# Altium PCB blm_ctrl_avr.PcbDoc
Units mil, origin at the board's own origin, x right, y up, seen from the top; angles counter-clockwise.
Board outline 2500 x 708.66 mil, 2 copper layers (Top Layer, Bottom Layer); 90 components, 52 nets, 216 pads, 53 vias.
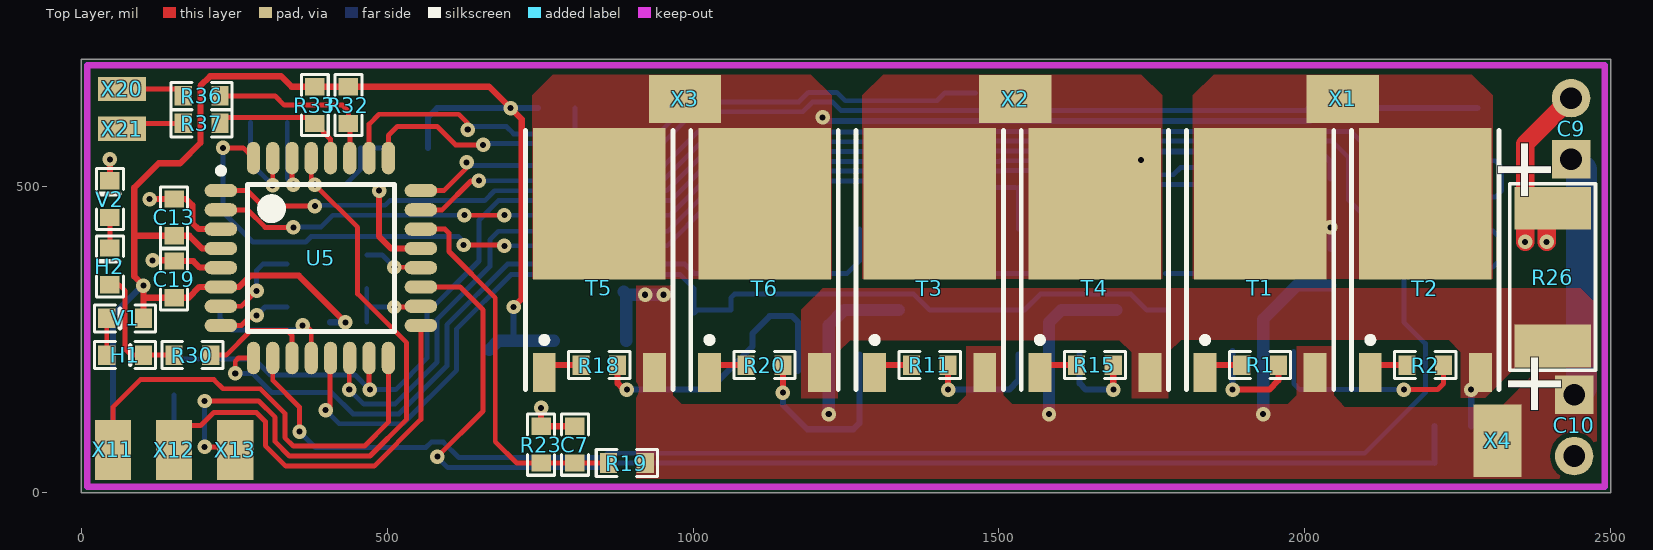
[diagram p0: Top Layer view]
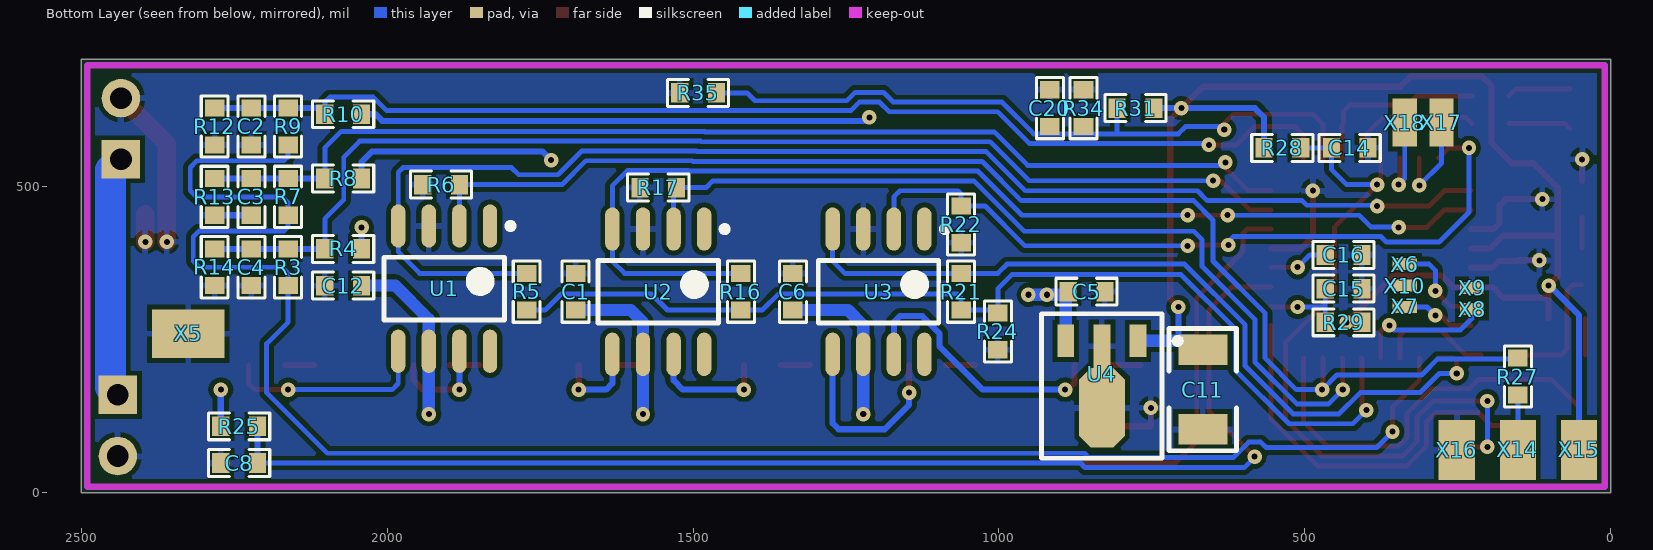
[diagram p1: Bottom Layer view, seen from below]

## Layer stack, top to bottom
Top Layer: signal copper 1.4
Dielectric: dielectric 12.6, FR-4, Dk 4.8
Bottom Layer: signal copper 1.4

## Board outline
0,0 2500,0 2500,708.66 0,708.66

## Design rules (kind name [scope] priority, off if disabled: settings)
Clearance [All] p1: gap=8
PolygonConnect PolygonConnect_1 [(InNet('PHASE_A') OR InNet('PHASE_B') OR InNet('PHASE_C')  OR InNet('NetR25_1') OR InNet('VBAT')) vs (InNet('PHASE_A') OR InNet('PHASE_B') OR InNet('PHASE_C')  OR InNet('NetR25_1') OR InNet('VBAT'))] p1: connectstyle=Direct reliefconductorwidth=10 reliefentries=4 polygonreliefangle="90 Angle"
PolygonConnect [All] p2: connectstyle=Relief reliefconductorwidth=10 reliefentries=4 polygonreliefangle="90 Angle"
RoomDefinition blm_ctrl_processor [InComponentClass('blm_ctrl_processor')] p1: confinementstyle=ConfineIn formatcopy=TRUE lockcomponents=FALSE outline -3968.19,-1186.34 4766.81,-1186.34 4766.81,1858.66 -3968.19,1858.66
RoomDefinition blm_ctrl_power [InComponentClass('blm_ctrl_power')] p2: confinementstyle=ConfineIn formatcopy=TRUE lockcomponents=FALSE outline -4038.19,-1331.34 4986.81,-1331.34 4986.81,1633.66 -4038.19,1633.66
RoutingVias [All] p1: holewidth=9.84 width=23.62 viastyle="Through Hole" minholewidth=9.84 minwidth=23.62 maxholewidth=28 maxwidth=50
SilkToSilkClearance [All] p1 off: silktosilkclearance=10
SilkscreenOverComponentPads [All] p1 off: minsilkscreentomaskgap=3.94
SolderMaskExpansion [All] p1: expansion=4
TestPointUsage [All] p1: valid=0 allowmultiple=FALSE
Testpoint [All] p1: side=15 testpointundercomponent=TRUE minsize=40 maxsize=100 preferedsize=60 minholesize=0 maxholesize=40 preferedholesize=32 testpointgrid=1 style=1023 order=0-112345678
Width [All] p1: maxlimit=200 minlimit=5.91 preferedwidth=8
22 further rules are at their usual default settings.

## Classes and differential pairs
component class blm_ctrl_power: C1 C2 C3 C4 C5 C6 C7 C8 C9 C10 C11 C12 C13 R1 R2 R3 R4 R5 R6 R7 R8 R9 R10 R11 R12 R13 R14 R15 R16 R17 R18 R19 R20 R21 R22 R23 R24 R25 R26 T1 T2 T3 T4 T5 T6 U1 U2 U3 U4 X1 X2 X3 X4 X5
component class blm_ctrl_processor: C14 C15 C16 C17 C18 C19 C20 H1 H2 R27 R28 R29 R30 R31 R32 R33 R34 R35 R36 R37 U5 V1 V2 X6 X7 X8 X9 X10 X11 X12 X13 X14 X15 X16 X17 X18 X19 X20 X21

## Components (designator, comment, footprint, x,y, rotation, side; value= is the part's Value field where it differs from the comment)
C1 "Cap" 0603#1 1691.81,298.66 r180 bottom
C2 "Cap" 0603#2 2221.81,628.66 r180 bottom
C3 "Cap" 0603#2 2221.81,513.66 r180 bottom
C4 "Cap" 0603#2 2221.81,398.66 r180 bottom
C5 "Cap" 0603#1 886.81,328.66 r270 bottom
C6 "Cap" 0603#1 1336.81,298.66 r180 bottom
C7 "Cap" 0603#1 806.81,48.66 r0 top
C8 "Cap" 0603#1 2211.81,48.66 r90 bottom
C9 "Cap Pol2" C00101 2435,645 r270 top
C10 "Cap Pol2" C00101 2440,60 r90 top
C11 "Cap Pol2" 1206 666.81,233.66 r270 bottom
C12 "Cap" 0603#1 2041.81,338.66 r90 bottom
C13 "Cap" 0603#1 151.81,420 r0 top
C14 "Cap" 0603#1 456.81,563.66 r270 bottom
C15 "Cap" 0603#1 466.81,333.66 r270 bottom
C16 "Cap" 0603#1 466.81,388.66 r270 bottom
C19 "Cap" 0603#1 151.81,318.66 r0 top
C20 "Cap" 0603#1 916.81,598.66 r180 bottom
H1 "Led" 0603_LED 41.81,225 r270 top
H2 "Led" 0603_LED 46.81,340 r0 top
R1 "Res1" 0603#1 1896.81,208.66 r270 top
R2 "Res1" 0603#1 2166.81,208.66 r270 top
R3 "Res1" 0603#2 2161.81,338.66 r0 bottom
R4 "Res1" 0603#2 2101.81,398.66 r90 bottom
R5 "Res1" 0603#1 1771.81,358.66 r0 bottom
R6 "Res1" 0603#1 1881.81,503.66 r90 bottom
R7 "Res1" 0603#2 2161.81,453.66 r0 bottom
R8 "Res1" 0603#2 2101.81,513.66 r90 bottom
R9 "Res1" 0603#2 2161.81,568.66 r0 bottom
R10 "Res1" 0603#2 2101.81,618.66 r90 bottom
R11 "Res1" 0603#1 1356.81,208.66 r270 top
R12 "Res1" 0603#2 2281.81,628.66 r180 bottom
R13 "Res1" 0603#2 2281.81,513.66 r180 bottom
R14 "Res1" 0603#2 2281.81,398.66 r180 bottom
R15 "Res1" 0603#1 1626.81,208.66 r270 top
R16 "Res1" 0603#1 1421.81,358.66 r0 bottom
R17 "Res1" 0603#1 1526.81,498.66 r90 bottom
R18 "Res1" 0603#1 816.81,208.66 r270 top
R19 "Res1" 0603#1 921.81,48.66 r90 top
R20 "Res1" 0603#1 1086.81,208.66 r270 top
R21 "Res1" 0603#1 1061.81,358.66 r0 bottom
R22 "Res1" 0603#1 1061.81,468.66 r0 bottom
R23 "Res1" 0603#1 751.81,48.66 r0 top
R24 "Res1" 0603#1 1001.81,293.66 r0 bottom
R25 "Res1" 0603#1 2271.81,108.66 r270 bottom
R26 "Res1" 2512 2405,240 r90 top
R27 "Res1" 0603#1 151.81,160 r180 bottom
R28 "Res1" 0603#1 566.81,563.66 r270 bottom
R29 "Res1" 0603#1 406.81,278.66 r90 bottom
R30 "Res1" 0603#1 211.81,225 r90 top
R31 "Res1" 0603#1 746.81,628.66 r90 bottom
R32 "Res1" 0603#1 436.81,663.66 r180 top
R33 "Res1" 0603#1 381.81,663.66 r180 top
R34 "Res1" 0603#1 861.81,598.66 r180 bottom
R35 "NTC" 0603#1 1461.81,653.66 r90 bottom
R36 "Res1" 0603#1 226.81,648.66 r90 top
R37 "Res1" 0603#1 226.81,603.66 r90 top
T1 "BSH203" TO-252AA 1926.81,334.41 r0 top locked
T2 "BSS123" TO-252AA 2196.81,334.41 r0 top locked
T3 "BSH203" TO-252AA 1386.81,334.41 r0 top locked
T4 "BSS123" TO-252AA 1656.81,334.41 r0 top locked
T5 "BSH203" TO-252AA 846.81,334.41 r0 top locked
T6 "BSS123" TO-252AA 1116.81,334.41 r0 top locked
U1 "TC4428A" SOIC127P600-8BN 1906.81,333.66 r270 bottom
U2 "TC4428A" SOIC127P600-8BN 1556.81,328.66 r270 bottom
U3 "TC4428A" SOIC127P600-8BN 1196.81,328.66 r270 bottom
U4 "µA78L05ACPKR" PK03 831.81,193.66 r0 bottom
U5 "ATmega8-16AC" 32A_L 391.81,383.66 r0 top locked
V1 "Diode" 0603_LED 101.81,285 r90 top
V2 "Diode" 0603_LED 46.81,450 r0 top
X1 "" PAD_SMD_2x3MM#1 2061.81,643.66 r90 top
X2 "" PAD_SMD_2x3MM#1 1526.81,643.66 r90 top
X3 "" PAD_SMD_2x3MM#1 986.81,643.66 r90 top
X4 "" PAD_SMD_2x3MM#1 2315,85 r0 top
X5 "" PAD_SMD_2x3MM#2 2325,260 r270 top
X6 "" PAD_SMD_0.5x1MM 336.81,373.66 r90 bottom
X7 "" PAD_SMD_0.5x1MM 336.81,303.66 r90 bottom
X8 "" PAD_SMD_0.5x1MM 226.81,300 r270 bottom
X9 "" PAD_SMD_0.5x1MM 226.81,335 r270 bottom
X10 "" PAD_SMD_0.5x1MM 336.81,338.66 r90 bottom
X11 "" PAD_SMD_1.5x2.5MM#1 51.81,70 r180 top
X12 "" PAD_SMD_1.5x2.5MM#2 156.81,70 r180 top
X13 "" PAD_SMD_1.5x2.5MM#3 236.81,70 r180 top
X14 "" PAD_SMD_1.5x2.5MM#4 151.81,70 r180 top
X15 "" PAD_SMD_1.5x2.5MM#4 51.81,70 r180 top
X16 "" PAD_SMD_1.5x2.5MM#4 251.81,70 r180 top
X17 "" PAD_SMD_1x2MM 276.81,605 r0 bottom
X18 "" PAD_SMD_1x2MM 336.81,605 r0 bottom
X20 "" PAD_SMD_1x2MM 66.81,660 r90 top
X21 "" PAD_SMD_1x2MM 66.81,595 r90 top

## Footprints (in the part's own frame and the unit in brackets; to place one, negate y for a bottom-side part, rotate by r counter-clockwise, add the part's x,y. Pads: shape width x height; smd on the part's side, far side on the other; paste and mask are expansions set on the pad)
32A_L [mm] "Thin QFP, 32-Leads, Body 7x7mm, Pitch 0.8mm, IPC High Density"
  oval 1.35x0.55 smd: 1(-4.15,2.8) 2(-4.15,2) 3(-4.15,1.2) 4(-4.15,0.4) 5(-4.15,-0.4) 6(-4.15,-1.2) 7(-4.15,-2) 8(-4.15,-2.8) 17(4.15,-2.8) 18(4.15,-2) 19(4.15,-1.2) 20(4.15,-0.4) 21(4.15,0.4) 22(4.15,1.2) 23(4.15,2) 24(4.15,2.8)
  oval 0.55x1.35 smd: 9(-2.8,-4.15) 10(-2,-4.15) 11(-1.2,-4.15) 12(-0.4,-4.15) 13(0.4,-4.15) 14(1.2,-4.15) 15(2,-4.15) 16(2.8,-4.15) 25(2.8,4.15) 26(2,4.15) 27(1.2,4.15) 28(0.4,4.15) 29(-0.4,4.15) 30(-1.2,4.15) 31(-2,4.15) 32(-2.8,4.15)
  silkscreen extent -4.27,-3.05 3.05,3.75, body extent -3.5,-3.5 3.5,3.5, height 1.2
0603#1 [mil]
  rect 32x28 smd: 1(0,0) 2(0,60)
  silkscreen extent -22,-20 22,80
0603#2 [mil]
  rect 32x28 smd: 1(0,0) 2(0,-60)
  silkscreen extent -22,-80 22,20
0603_LED [mil]
  rect 32.01x27.99 smd: 1(0,0) 2(0,60)
  silkscreen extent -22,-20 22,80
1206 [mil]
  rect 50x80 smd: 1(0,0) 2(130,0)
  silkscreen extent -35,-55 165,55
2512 [mil]
  rect 70x125 smd: 1(0,0) 2(225,0)
  silkscreen extent -40,-70 265,70
C00101 [mm]
  rect 1.6x1.6 hole 0.9: 1(2.54,0)
  round 1.6 hole 0.9: 2(0,0)
PAD_SMD_0.5x1MM [mm]
  rect 0.5x1 smd: 1(0,0)
PAD_SMD_1.5x2.5MM#1 [mm]
  rect 1.5x2.5 smd: 1(0,0)
PAD_SMD_1.5x2.5MM#2 [mm]
  rect 1.5x2.5 smd: 1(0.127,0)
PAD_SMD_1.5x2.5MM#3 [mm]
  rect 1.5x2.5 smd: 1(-0.381,0)
PAD_SMD_1.5x2.5MM#4 [mm]
  rect 1.5x2.5 smd far side: 1(0,0)
PAD_SMD_1x2MM [mm]
  rect 1x2 smd: 1(0,0)
PAD_SMD_2x3MM#1 [mm]
  rect 2x3 smd: 1(0,0)
PAD_SMD_2x3MM#2 [mm]
  rect 2x3 smd far side: 1(0,0)
PK03 [mm] "SOT-89; Body 4.6 x 4.25 mm, inc. leads (LxW max)"
  oct 1.9x3.3 smd: 0(0,1.388)
  rect 0.7x1.35 smd: 1(-1.5,-1.388) 3(1.5,-1.388)
  rect 0.7x1.8 smd: 2(0,-1.163)
  silkscreen extent -3.27,-2.51 2.5,3.49
SOIC127P600-8BN [mm] "SOIC, 8-Leads, Body 4.9x3.9mm, Pitch 1.27mm, IPC Medium Density"
  oval 1.8x0.6 smd: 1(-2.6,1.905) 2(-2.6,0.635) 3(-2.6,-0.635) 4(-2.6,-1.905) 5(2.6,-1.905) 6(2.6,-0.635) 7(2.6,0.635) 8(2.6,1.905)
  silkscreen extent -2.72,-2.5 1.3,2.88, body extent -2,-2.5 2,2.5, height 2.59
TO-252AA [mm] "D-PAK/TO-252-AA; 3 Leads (1 Cropped); Body 10.2 (inc. leads) x 6.7 mm (LxW max)"
  rect 0.95x1.6 smd: 1(-2.285,-3.5) 3(2.285,-3.5)
  rect 5.5x6.3 smd: 4(0,3.5)
  silkscreen extent -3.06,-4.2 3.06,6.55

## Part data
C1 C2 C3 C4 C5 C6 C7 C8 C12 C13 C14 C15 C16 C19 C20: "Capacitor"
C9 C10 C11: "Polarized Capacitor (Axial)"
H1 H2: "Led low current"
R1 R2 R3 R4 R5 R6 R7 R8 R9 R10 R11 R12 R13 R14 R15 R16 R17 R18 R19 R20 R21 R22 R23 R24 R25 R26 R27 R28 R29 R30 R31 R32 R33 R34 R36 R37: "Resistor"
R35: "Temperature dependent resistor"
T1 T3 T5: "P-CHANNEL MOSFET WITH DIODE"
T2 T4 T6: "N-CHANNEL MOSFET WITH DIODE"
U4: "Positive-Voltage Regulator"
U5: "8-Bit AVR Microcontroller with 8K Bytes of In-System Programmable Flash Memory"
X1 X2 X3 X4 X5 X6 X7 X8 X9 X10 X11 X12 X13 X14 X15 X16 X17 X18 X20 X21: library part TEST_POINT

## Via types
v1: diameter 23.62, hole 9.84, Top Layer to Bottom Layer, tented both sides, 31 vias
v2: diameter 23.62, hole 9.84, Top Layer to Bottom Layer, 22 vias

## Nets (pads, with @x,y where several pads share a name; then routed paths per layer and width w, separated by ;. In a path a pad name is that pad's centre, name@x,y a point inside that pad or via, vN(x,y) a via of type N, cw(c..) or ccw(c..) an arc to the next point about the centre after c; other vN are vias at no path point)
ADR1: U5.7 X6.1 | length 156.6
  Top Layer w8: U5.7 261.73,304.92 v2(286.81,330)
  Bottom Layer w8: v2(286.81,330) 286.81,363.66 296.81,373.66 X6.1
ADR2: U5.8 X7.1 | length 122.1
  Top Layer w8: U5.8 261.81,273.43 278.39,290 v2(286.81,290)
  Bottom Layer w8: v2(286.81,290) 300.47,303.66 X7.1
  Bottom Layer w10: v2(286.81,290) v2@287.62,289.19
ADR3_PPM: U5.12 X8.1 | length 223.1
  Top Layer w8: v2(361.81,273.66) 366.81,273.66 376.06,264.41 U5.12
  Bottom Layer w8: X8.1 226.81,285 245.62,266.19 354.34,266.19 v2(361.81,273.66)
CTRL_H_A: R6.1 R27.2 U1.2 U5.15 | length 2122.8
  Top Layer w8: v1@470.55,169.92 U5.15
  Bottom Layer w8: R27.2 153,218.81 283,218.81 309.33,192.49 447.99,192.49 v1(471.81,168.66) 513.93,168.66 565.06,219.79 565.06,293.66 650.15,378.76 650.15,445.67 681.95,477.47 963.5,477.47 1027.69,541.66 1500.21,541.66 1501.21,542.66 1675.18,542.66 1714.18,503.66 R6.1 U1.2
CTRL_H_B: R17.1 U2.2 U5.14 | length 1440.3
  Top Layer w8: v1(438.14,168.66) 438.14,219.36 U5.14
  Bottom Layer w8: v1(438.14,168.66) 461.95,144.85 512.75,144.85 581.68,213.79 581.68,283.53 668,369.85 668,413.52 681.95,427.47 958.76,427.47 1040.95,509.66 1467.81,509.66 1478.81,498.66 R17.1 ; U2.2 R17.1@1531.81,498.66
CTRL_H_C: R22.1 U3.2 U5.32 | length 1240.7
  Top Layer w8: v2(231.81,563.66) 264.96,563.66 U5.32 ; v2(625,405) 690.47,405 v1(691.81,403.66)
  Bottom Layer w8: v2(231.81,563.66) 231.81,458.66 280.62,409.85 366.81,409.85 375.62,418.66 400.48,418.66 616.81,418.66 625,410.47 v2(625,405) ; v1(691.81,403.66) 957.58,403.66 1022.58,468.66 R22.1 1061.81,488.66 1066.81,493.66 1161.81,493.66 1171.81,483.66 U3.2
CTRL_L_A: R5.1 U1.4 U5.1 | length 2190.5
  Top Layer w8: U5.1 271.81,493.9 297.05,468.66 v1(381.81,468.66)
  Bottom Layer w8: v1@382.89,477.47 379.05,473.62 379.05,471.43 380.62,469.85 496.67,469.85 504.3,477.47 659.32,477.47 675.51,493.66 957.07,493.66 1021.07,557.66 1493.59,557.66 1494.59,558.66 1681.81,558.66 1720.62,519.85 1785,519.85 1796.81,531.66 1973.81,531.66 1981.81,523.66 U1.4 1981.81,393.66 1946.81,358.66 R5.1
CTRL_L_B: R16.1 U2.4 U5.2 | length 1817.4
  Top Layer w8: U5.2 271.81,462.4 300.55,433.66 v2(346.81,433.66) ; v2(626.34,453.66) v1(691.81,453.66)
  Bottom Layer w8: v2(346.81,433.66) 347.81,434.66 392.29,434.66 411.29,453.66 631.81,453.66 631.81,458.66 v2@630.87,459.6 ; v1(691.81,453.66) 962.32,453.66 1034.32,525.66 1506.84,525.66 1507.84,526.66 1607,526.66 1631.81,501.85 U2.4 1631.81,378.66 1611.81,358.66 R16.1
CTRL_L_C: R21.1 U3.4 U5.9 | length 1307.1
  Top Layer w8: v1(251.81,195) 251.81,215 257.09,220.28 U5.9
  Bottom Layer w8: v1(251.81,195) 280.47,195 311.81,163.66 409.46,163.66 444.27,128.85 519.37,128.85 597.68,207.16 597.68,274.53 696.81,373.66 986.81,373.66 1001.81,358.66 R21.1 1251.81,358.66 1271.81,378.66 U3.4
CTRL_L_COM: R5.2 R16.2 R21.2 R24.1 U5.13 | length 1718.9
  Top Layer w8: v1(399.49,135) 402.87,135 406.81,138.94 406.81,219.53 U5.13
  Bottom Layer w8: v1(399.49,135) 421.64,112.85 526,112.85 613.68,200.53 613.68,267.91 702.44,356.66 978.81,356.66 1001.81,333.66 R24.1 1006.81,298.66 R21.2 1061.81,318.66 1067.81,324.66 1360.81,324.66 1386.81,298.66 R16.2 1541.81,298.66 1567.81,324.66 1715.81,324.66 1741.81,298.66 R5.2
GND: C1.2 C2.2 C3.2 C4.2 C5.2 C6.2 C7.2 C8.2 C9.2 C10.2 C11.2 C12.2 C13.2 C14.2 C15.2 C16.2 C19.2 C20.2 R6.2 R12.2 R13.2 R14.2 R17.2 R22.2 R23.2 R24.2 R26.2 R34.2 R35.2 U1.3 U2.3 U3.3 U4.0 U4.2 U5.3 U5.5 U5.21 V2.2 X5.1 X9.1 X10.1 X16.1 | length 911.1
  Top Layer w10: V2.2 v2(46.81,545) ; v2(111.81,480) C13.2 171.81,480 181.81,470 181.81,440.91 191.81,430.91 U5.3 ; v2(116.81,380) C19.2@150.47,380 ; C19.2 183.15,378.66 193.9,367.91 U5.5 ; v2(486.81,493.66) 486.81,418.66 506.06,399.41 U5.21 ; v1(751.81,138.66) R23.2 C7.2
  Top Layer w30: v2(2360,410) 2360,570 C9.2 ; v2(2395,410) R26.2@2395,455
  Bottom Layer w10: C3.2 R13.2
IMOT_MEAS: C8.1 R25.2 U5.19 | length 2097.9
  Top Layer w8: U5.19 619.05,336.42 656.81,298.66 656.81,133.66 v1(582.21,59.06)
  Bottom Layer w8: v1(582.21,59.06) 582.21,63.56 581.81,63.56 581.81,58.66 599.31,41.16 859.31,41.16 866.81,48.66 C8.1
  Bottom Layer w10: C8.1 R25.2
LEDS: R30.1 U5.11 | length 189.5
  Top Layer w8: R30.1 236.81,225 276.81,265 336.8,265 344.57,257.23 U5.11
MIDDLE: R3.1 R7.1 R9.1 U5.10 | length 3056.8
  Top Layer w8: U5.10@310.75,217.96 U5.10 313.07,183.74 356.81,140 v1(356.81,100)
  Bottom Layer w8: v1(356.81,100) 382.85,73.96 563.43,73.96 572.35,82.87 592.08,82.87 617.48,57.47 852.99,57.47 860.18,64.66 2097.81,64.66 2196.81,163.66 2196.81,243.66 2161.81,278.66 R3.1 2161.81,358.66 2171.81,368.66 2306.81,368.66 2316.81,378.66 2316.81,418.66 2307.81,427.66 2168.81,427.66 2161.81,434.66 R7.1 2161.81,473.66 2171.81,483.66 2311.81,483.66 2321.81,493.66 2321.81,531.66 2310.81,542.66 2168.81,542.66 2161.81,549.66 R9.1
MISO: U5.16 X11.1 | length 728.4
  Top Layer w8: X11.1 51.81,140 96.81,185 216.81,185 231.81,170 292.78,170 333,129.78 333,90.14 346.95,76.19 463,76.19 502.05,115.24 U5.16
MOSI: R27.1 X14.1 | length 90
  Bottom Layer w8: X14.1 R27.1
NetC15_1: C15.1 R29.2 U5.18 | length 143.9
  Top Layer w8: v1(511.81,303.66) 553.94,303.66 U5.18
  Bottom Layer w8: R29.2 466.81,303.66 ; C15.1 466.81,303.66 ; v1(511.81,303.66) 466.81,303.66
NetC16_1: C16.1 U5.20 | length 97
  Top Layer w8: v1(511.81,368.66) 554.45,368.66 U5.20
  Bottom Layer w8: C16.1 491.81,388.66 v1(511.81,368.66)
NetH1_1: H1.1 V1.2 | length 60
  Top Layer w8: H1.1 V1.2
NetH1_2: H1.2 H2.1 R30.2 | length 208.3
  Top Layer w8: H2.1 61.81,340 71.81,330 71.81,235 81.81,225 H1.2 R30.2
NetH2_2: H2.2 V2.1 | length 50
  Top Layer w8: H2.2 V2.1
NetR1_1: R1.1 T1.1 | length 47.9
  Top Layer w10: T1.1@1848.9,208.66 R1.1
NetR1_2: R1.2 U1.7 | length 168.9
  Top Layer w10: v1(1881.81,168.66) 1941.81,168.66 1956.81,183.66 R1.2
  Bottom Layer w10: v1(1881.81,168.66) U1.7
NetR2_1: R2.1 T2.1 | length 47.9
  Top Layer w10: T2.1@2118.9,208.66 R2.1
NetR2_2: R2.2 U1.5 | length 335.9
  Top Layer w8: v1(2161.81,168.66) 2216.81,168.66 2226.81,178.66 R2.2
  Bottom Layer w8: U1.5 1981.81,178.66 1991.81,168.66 v1(2161.81,168.66)
NetR11_1: R11.1 T3.1 | length 47.9
  Top Layer w10: T3.1@1308.9,208.66 R11.1
NetR11_2: R11.2 U2.7 | length 203.9
  Top Layer w10: v1(1416.81,168.66) R11.2
  Bottom Layer w10: v1(1416.81,168.66) 1516.81,168.66 1531.81,183.66 U2.7
NetR15_1: R15.1 T4.1 | length 47.9
  Top Layer w10: T4.1@1578.9,208.66 R15.1
NetR15_2: R15.2 U2.5 | length 146.8
  Top Layer w10: v1(1686.81,168.66) R15.2
  Bottom Layer w10: U2.5 1631.81,178.66 1641.81,168.66 v1(1686.81,168.66)
NetR18_1: R18.1 T5.1 | length 47.9
  Top Layer w10: T5.1@768.9,208.66 R18.1
NetR18_2: R18.2 U3.7 | length 475.4
  Top Layer w10: R18.2 876.81,178.66 886.81,168.66 v1(891.81,168.66)
  Bottom Layer w10: v1(891.81,168.66) 1026.81,168.66 1097,238.85 1097,260.2 1125.46,288.66 1161.81,288.66 1171.81,278.66 U3.7 U3.7@1171.81,198.75
NetR20_1: R20.1 T6.1 | length 47.9
  Top Layer w10: T6.1@1038.9,208.66 R20.1
NetR20_2: R20.2 U3.5 | length 323.2
  Top Layer w10: v1(1146.81,163.66) R20.2
  Bottom Layer w10: v1(1146.81,163.66) 1146.81,143.66 1186.62,103.85 1262,103.85 1271.81,113.66 U3.5
NetR25_1: R25.1 R26.1 T2.3 T4.3 T6.3 | length 60
  Bottom Layer w10: R25.1 v1(2271.81,168.66)
NetR36_2: R36.2 X20.1 | length 104.7
  Top Layer w8: X20.1 155.47,660 R36.2
NetR37_2: R37.2 X21.1 | length 103.6
  Top Layer w8: X21.1 75.47,603.66 R37.2
NULL_A: C4.1 R3.2 R4.1 R14.1 U5.23 | length 1916
  Top Layer w8: U5.23 590,462.4 637.13,509.53 650,509.53 v1(650,510)
  Bottom Layer w8: v1(650,510) 950.78,510 1014.44,573.66 1486.96,573.66 1487.96,574.66 2044.81,574.66 2070.81,548.66 2070.81,478.66 2101.81,447.66 R4.1
  Bottom Layer w10: R4.1 R3.2 C4.1 R14.1
NULL_B: C3.1 R7.2 R8.1 R13.1 U5.24 | length 1840.2
  Top Layer w8: U5.24 592.78,493.9 630,531.12 v1(630,540) v1@630.47,539.53
  Bottom Layer w8: v1(630,540) 630.47,540 634.67,535.8 v1@634.67,535.08 ; v1@636.09,533.66 v1@634.67,535.08 ; R8.1 2101.81,563.66 2074.81,590.66 1481.33,590.66 1480.52,589.85 1008,589.85 953.23,535.08 v1@634.67,535.08
  Bottom Layer w10: R8.1 R7.2 C3.1 R13.1
NULL_C: C2.1 R9.2 R10.1 R12.1 U5.25 | length 1901.8
  Top Layer w8: U5.25 502.05,583.9 516.81,598.66 581.81,598.66 611.81,568.66 v1(656.81,568.66)
  Bottom Layer w8: v1@656.81,569.55 657.92,570.66 949.93,570.66 1001.93,622.66 1179.51,622.66 1195.32,638.47 1228.3,638.47 1242.11,624.66 2000.84,624.66 2022.84,646.66 2093.81,646.66 2101.81,638.66 2101.81,628.66 R10.1
  Bottom Layer w10: R10.1@2101.81,628.66 R9.2 C2.1 R12.1
P5V: C11.1 C13.1 C19.1 R28.1 R29.1 R31.1 R32.1 R33.1 U4.1 U5.4 U5.6 V1.1 X15.1 | length 2571.9
  Top Layer w10: V1.1 v2(101.81,338.66) 86.81,353.66 86.81,420 ; 101.81,318.66 C19.1 175.47,318.66 193.23,336.42 U5.6 258.14,336.42 276.53,354.81 355.66,354.81 v2(431.81,278.66) ; U5.4 197.4,399.41 176.81,420 C13.1 86.81,420 ; v2(706.81,303.66) 720,316.85 720,610.47 v2(701.81,628.66) 666.81,663.66 R32.1 R33.1 343.97,663.66 326.81,680.82 210.58,680.82 194.81,665.05 194.81,571.66 161.81,538.66 126.81,538.66 86.81,498.66 86.81,420
  Bottom Layer w10: X15.1 51.81,290 101.81,340 v2(101.81,338.66) ; R29.1 v2(431.81,278.66) ; R28.1 566.81,613.66 581.81,628.66 v2(701.81,628.66) R31.1 ; 706.81,248.29 v2(706.81,303.66)
  Bottom Layer w20: C11.1 681.44,248.29 U4.1
PHASE_A: R4.2 T1.4 T2.4 X1.1 | length 35
  Bottom Layer w10: R4.2 v1(2041.81,433.66)
PHASE_B: R8.2 T3.4 T4.4 X2.1 | length 349.9
  Bottom Layer w10: v1(1731.81,543.66) 1745.81,557.66 2024.98,557.66 2041.81,540.83 R8.2
PHASE_C: R10.2 T5.4 T6.4 X3.1 | length 837
  Bottom Layer w10: v1(1211.81,613.66) 1217.81,607.66 2007.88,607.66 2018.88,618.66 R10.2
RESET: C14.1 R28.2 U5.29 X13.1 | length 1208.9
  Top Layer w8: v1(201.81,75) 246.81,75 X13.1 ; v1(201.81,150) 290.15,150 317,123.15 317,83.51 340.32,60.19 472,60.19 531.81,120 531.81,245 451.81,325 451.81,433.66 v2(381.81,503.66) 376.3,503.66 376.06,503.9 U5.29
  Bottom Layer w8: v1(201.81,75) v1(201.81,150) ; v2@380.32,503.66 v2(381.81,503.66) 431.81,503.66 456.81,528.66 C14.1 R28.2
RXD: U5.30 X18.1 | length 154.3
  Top Layer w8: U5.30 344.57,501.42 v2(346.81,503.66)
  Bottom Layer w8: X18.1 336.81,513.66 v2(346.81,503.66)
SCK: U5.17 X12.1 | length 656.8
  Top Layer w8: X12.1@151.81,110 195.48,110 216.7,131.21 286.31,131.21 301,116.52 301,76.88 334.38,43.51 478.7,43.51 555.2,120 U5.17
SCL: R33.2 R37.1 U5.28 | length 230.6
  Top Layer w8: R37.1 236.81,613.66 371.81,613.66 R33.2 407.56,577.91 U5.28
SDA: R32.2 R36.1 U5.27 | length 297.9
  Top Layer w8: R36.1 316.81,648.66 331.81,633.66 426.81,633.66 436.81,623.66 R32.2 439.06,601.42 U5.27
TEMP_MEAS: C20.1 R31.2 R34.1 R35.1 U5.26 | length 1157.8
  Top Layer w8: U5.26 470.55,602.4 486.81,618.66 616.81,618.66 631.81,603.66 v1(631.81,593.66)
  Bottom Layer w8: v1(631.81,593.66) 636.81,598.66 694.81,598.66 706.81,586.66 806.81,586.66 ; R31.2 806.81,586.66 ; R35.1 1411.81,653.66 1398.81,640.66 1248.74,640.66 1234.93,654.47 1188.69,654.47 1172.88,638.66 995.3,638.66 943.3,586.66 861.81,586.66 806.81,586.66
TXD: U5.31 X17.1 | length 162.3
  Top Layer w8: v2(313.07,502.4) U5.31
  Bottom Layer w8: X17.1 276.81,538.66 v2(313.07,502.4)
VBAT: C1.1 C5.1 C6.1 C9.1 C10.1 C12.1 R19.1 T1.3 T3.3 T5.3 U1.6 U2.6 U3.6 U4.3 X4.1 | length 1372.7
  Bottom Layer w20: U4.3 890.87,324.61 C5.1 891.81,323.66 v2(921.81,323.66) v2(951.81,323.66) ; v1(1221.81,128.66) U3.6 1221.81,273.66 1246.81,298.66 C6.1 ; v1(1581.81,128.66) U2.6 1581.81,278.66 1601.81,298.66 C1.1 ; v1(1931.81,128.66) U1.6 1931.81,283.66 1986.81,338.66 C12.1
  Bottom Layer w50: C9.1 2452.16,527.84 2452.16,172.16 C10.1
VBAT_MEAS: C7.1 R19.2 R23.1 U5.22 | length 620.2
  Top Layer w8: U5.22 594.57,430.91 601.19,424.28 601.19,394.28 676.81,318.66 676.81,83.66 711.81,48.66 R23.1 C7.1 R19.2
pads on no net: U1.1 U1.8 U2.1 U2.8 U3.1 U3.8

## Polygon pours and split planes (outlines as drawn)
VBAT on Top Layer "Bottom Layer-No Net" (solid, pour order 1001): 906.81,338.66 966.81,338.66 966.81,159.41 981.81,144.41 1431.81,144.41 1446.81,159.41 1446.81,239.41 1506.81,239.41 1506.81,159.41 1521.81,144.41 1971.81,144.41 1986.81,159.41 1986.81,239.41 2046.81,239.41 2046.81,159.41 2065,140 2320,140 2395,215 2490.16,215 2490.16,10.06 906.81,9.84
NetR25_1 on Top Layer "Bottom Layer-No Net" (solid, pour order 1000): 1176.81,154.41 1176.81,299.41 1211.81,334.41 2450,335 2485,300 2485,205 2345,205 2295,155 2255,155 2255,230 2235,250 1796.81,249.41 1776.81,229.41 1776.81,154.41 1716.81,154.41 1716.81,229.41 1696.81,249.41 1256.81,249.41 1236.81,229.41 1236.81,154.41
PHASE_C on Top Layer "Bottom Layer-No Net" (solid, pour order 1000): 736.81,349.41 1226.81,349.41 1226.81,649.41 1167.56,708.66 796.06,708.66 736.81,649.41
PHASE_B on Top Layer "Bottom Layer-No Net" (solid, pour order 1001): 1276.81,349.41 1766.81,349.41 1766.81,649.41 1707.56,708.66 1336.06,708.66 1276.81,649.41
PHASE_A on Top Layer "Bottom Layer-No Net" (solid, pour order 1002): 1816.81,349.41 2306.81,349.41 2306.81,649.41 2247.56,708.66 1876.06,708.66 1816.81,649.41
GND on Bottom Layer "Bottom Layer-No Net" (solid, remove dead copper, pour order 1000): 2490.16,698.82 2490.16,9.84 -38.19,9.84 -38.19,698.82

## Keep-outs
Keep-Out Layer:
  lines w10: 9.84,9.84 9.84,698.82 2490.16,698.82 2490.16,9.84 9.84,9.84

## Silkscreen, mask and mechanical layers (free items; w line width, h text height)
Mechanical 2:
  the board outline again, w10

## Text inside footprints (layer, text, board x,y; h text height)
C9: Top Overlay "+" at 2316,585 h100 r270
C10: Top Overlay "+" at 2419,120 h100 r90